# EAGLE board main (EAGLE 7.7.0)
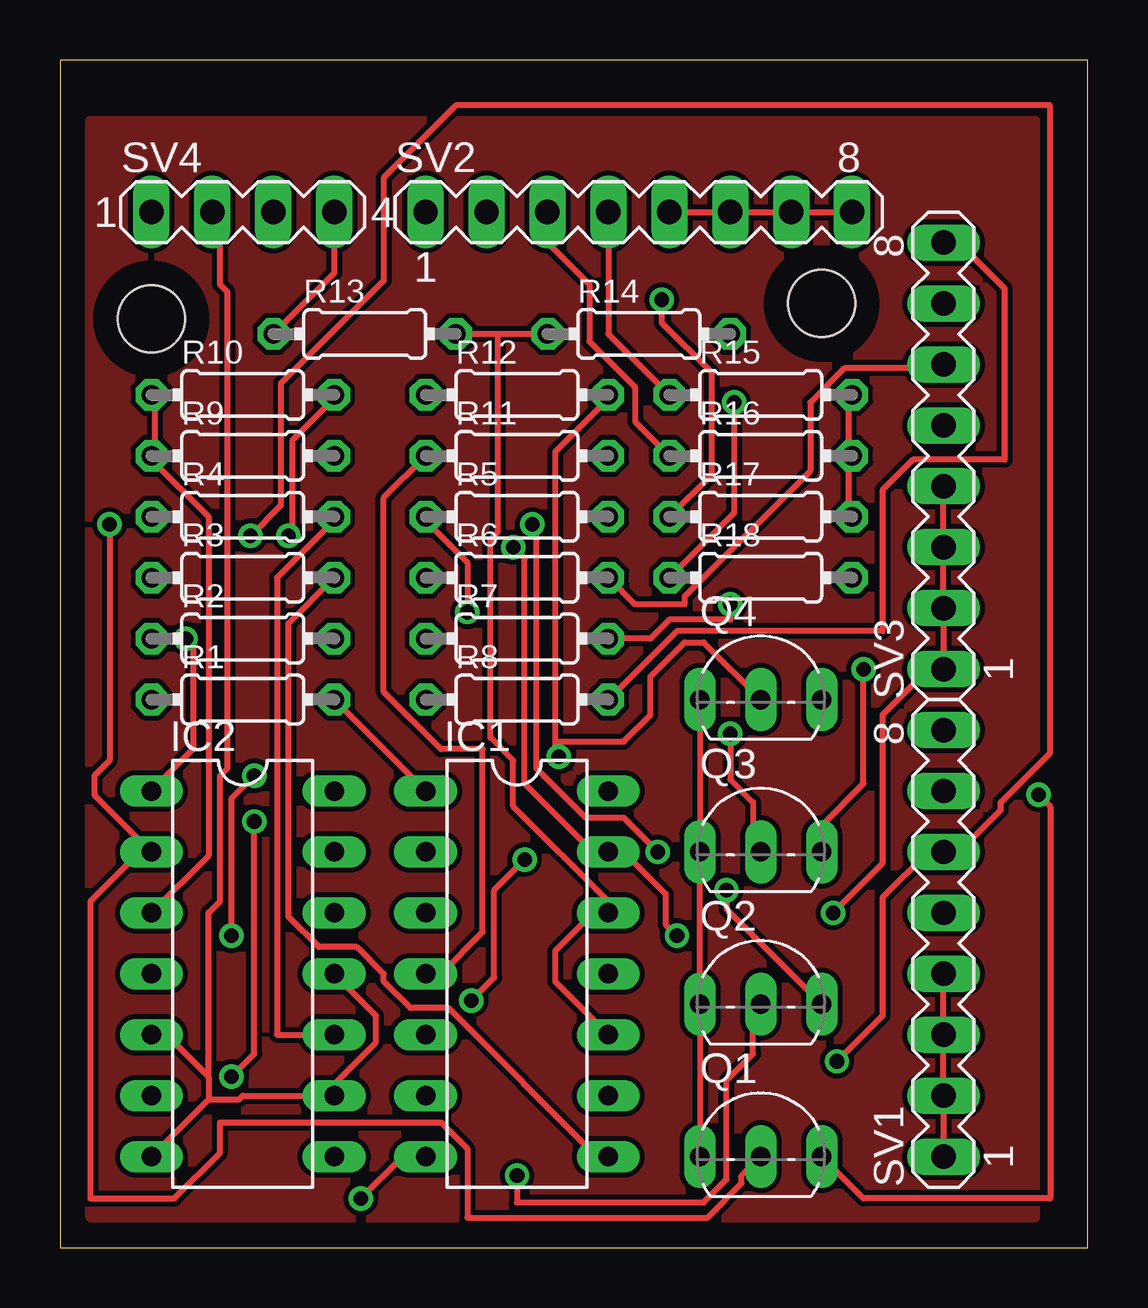
[diagram p0: board, top side]
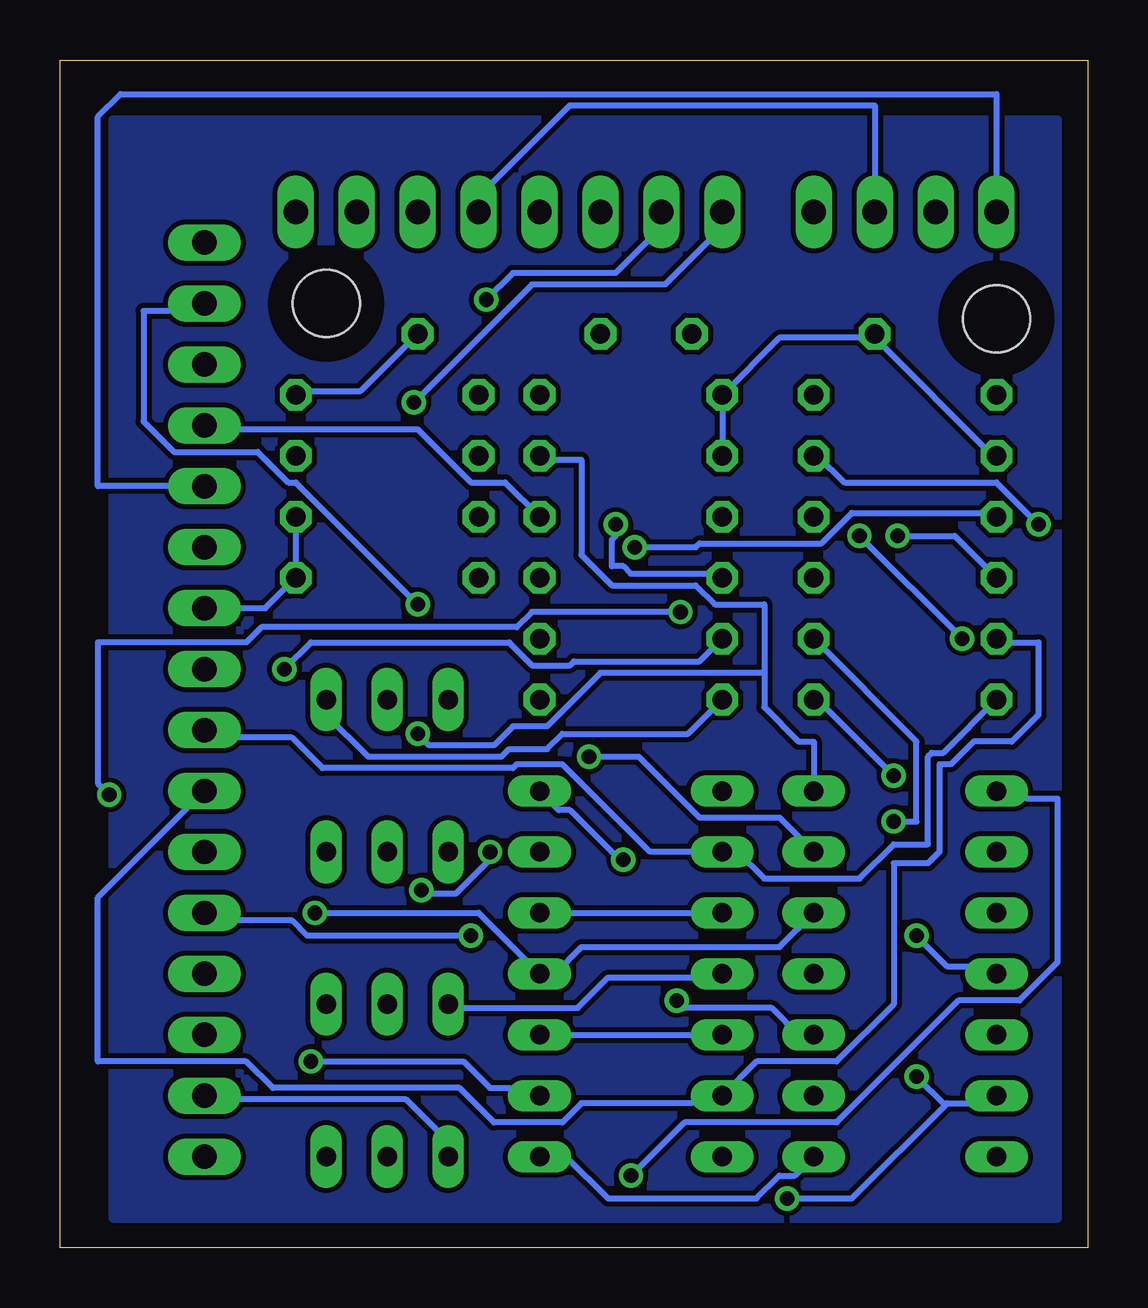
[diagram p1: board, bottom side, seen from below]

Size 42.85 x 49.52 mm. Coordinates in mm from the lower left corner, seen from the top.
Outline: 0,0 42.85,0 42.85,49.52 0,49.52 0,0
Copper layers (1*16): Top 0.035mm / dielectric 1.5mm / Bottom 0.035mm
Design rules "default": minimum track width 10mil, minimum drill 24mil, track to track 8mil, track to pad 8mil, pad to pad 8mil, via to via 8mil, smd to smd 8mil, copper to edge 40mil, drill to drill 8mil, minimum pad ring 10mil, minimum via ring 8mil, stop-mask expansion 4mil, vias tented up to drill 0mil, thermal gap 10mil
Holes 2.8 mm at 31.75,39.37 3.81,38.73

## Footprints (pad centres in the part's own frame; a part is rotated, then mirrored left to right if it is on the bottom)
DIL14 = drill 0.813 long: 1 -7.62,-3.81; 2 -5.08,-3.81; 3 -2.54,-3.81; 4 0,-3.81; 5 2.54,-3.81; 6 5.08,-3.81; 7 7.62,-3.81; 8 7.62,3.81; 9 5.08,3.81; 10 2.54,3.81; 11 0,3.81; 12 -2.54,3.81; 13 -5.08,3.81; 14 -7.62,3.81
TO92-EBC = drill 0.813 long: B 0,-1.27; C -2.54,-1.27; E 2.54,-1.27
0204/7 = drill 0.813 octagon: 1 -3.81,0; 2 3.81,0
MA08-1 = drill 1.016 long: 1 -8.89,0; 2 -6.35,0; 3 -3.81,0; 4 -1.27,0; 5 1.27,0; 6 3.81,0; 7 6.35,0; 8 8.89,0
MA04-1 = drill 1.016 long: 1 -3.81,0; 2 -1.27,0; 3 1.27,0; 4 3.81,0

## Placement (x,y rotation side)
IC1  LM324N  [DIL14]  19.05,11.43 270 top
IC2  LM339N  [DIL14]  7.62,11.43 270 top
Q1  BC487  [TO92-EBC]  29.21,5.08 0 top
Q2  BC487  [TO92-EBC]  29.21,11.43 0 top
Q3  BC487  [TO92-EBC]  29.21,17.78 0 top
Q4  BC487  [TO92-EBC]  29.21,24.13 0 top
R1  68kΩ  [0204/7]  7.62,22.86 0 top
R2  68kΩ  [0204/7]  7.62,25.4 0 top
R3  68kΩ  [0204/7]  7.62,27.94 0 top
R4  68kΩ  [0204/7]  7.62,30.48 0 top
R5  100Ω  [0204/7]  19.05,30.48 0 top
R6  100Ω  [0204/7]  19.05,27.94 0 top
R7  100Ω  [0204/7]  19.05,25.4 0 top
R8  100Ω  [0204/7]  19.05,22.86 0 top
R9  3k3Ω  [0204/7]  7.62,33.02 0 top
R10  3k3Ω  [0204/7]  7.62,35.56 0 top
R11  3k3Ω  [0204/7]  19.05,33.02 0 top
R12  3k3Ω  [0204/7]  19.05,35.56 0 top
R13  3k3Ω  [0204/7]  12.7,38.1 0 top
R14  3k3Ω  [0204/7]  24.13,38.1 0 top
R15  44Ω  [0204/7]  29.21,35.56 0 top
R16  44Ω  [0204/7]  29.21,33.02 0 top
R17  44Ω  [0204/7]  29.21,30.48 0 top
R18  44Ω  [0204/7]  29.21,27.94 0 top
SV1  Photodiode Connectors  [MA08-1]  36.83,12.7 90 top
SV2  IR LED Connectors  [MA08-1]  24.13,43.18 0 top
SV3  Visual LED Connector  [MA08-1]  36.83,33.02 90 top
SV4  Power In  [MA04-1]  7.62,43.18 0 top

## Library data of the parts
IC1 IC2 = linear
Q1-Q4 = transistor-npn
R1-R18 = resistor
SV1-SV4 = con-lstb; OC_FARNELL: unknown; OC_NEWARK: unknown

## Nets
5V: IC1.4 IC2.3 Q1.C Q2.C Q3.C Q4.C R9.1 R10.1 R11.1 R12.1 R13.1 SV1.1 SV1.2 SV1.3 SV1.4 SV4.4
+1.84V: SV2.5 SV2.6 SV2.7 SV2.8 SV4.3
AS1: IC1.1 IC2.4 R1.2
AS2: IC1.7 IC2.6 R2.2
AS3: IC1.8 IC2.8 R3.2
AS4: IC1.14 IC2.10 R4.2
GND: IC1.11 IC2.12 R14.2 R15.2 R16.2 R17.2 R18.2 SV3.1 SV3.2 SV3.3 SV3.4 SV4.1
N$1: Q1.E R5.1
N$4: Q2.E R6.1
N$5: Q3.E R7.1
N$6: Q4.E R8.1
N$12: R15.1 SV2.4
N$13: R16.1 SV2.3
N$14: R17.1 SV2.2
N$15: R18.1 SV2.1
PD1: IC1.2 R1.1 SV1.8
PD2: IC1.6 R2.1 SV1.7
PD3: IC1.9 R3.1 SV1.6
PD4: IC1.13 R4.1 SV1.5
T1: IC2.2 Q1.B R9.2
T2: IC2.1 Q2.B R10.2
T3: IC2.14 Q3.B R11.2
T4: IC2.13 Q4.B R12.2
VGND: IC1.3 IC1.5 IC1.10 IC1.12 R13.2 R14.1
VLED1: R5.2 SV3.5
VLED2: R6.2 SV3.6
VLED3: R7.2 SV3.7
VLED4: R8.2 SV3.8
VLOGIC: IC2.5 IC2.7 IC2.9 IC2.11 SV4.2

## Tracks (layer width: path | path; a pad name or v marks a point on that pad's centre or on a via)
5V
  Top 0.254: R13.1 11.43,40.64 SV4.4 | IC2.3 6.19,16.35 6.19,30.48 3.81,32.86 R9.1 3.97,32.86 3.97,35.4 R10.1 | SV1.1 SV1.2 SV1.3 SV1.4 | Q4.C Q3.C Q2.C Q1.C | R11.1 13.49,31.27 13.49,23.18 15.88,20.8 17.62,20.8 17.62,13.18 15.88,11.43 IC1.4
  Bottom 0.254: R11.1 R12.1 12.86,37.94 9.05,37.94 R13.1 8.89,37.94 3.97,33.02 R9.1 | IC1.4 15.4,11.27 20,11.27 21.27,10 26.51,10 Q2.C | SV1.2 36.67,6.19 28.42,6.19 26.67,4.45 Q1.C
+1.84V
  Top 0.254: SV2.5 SV2.6 SV2.7 SV2.8
  Bottom 0.254: SV4.3 8.89,47.62 21.59,47.62 25.4,43.81 SV2.5
AS1  (via drill 0.61)
  Top 0.254: v7.14,13.02 7.14,18.73 v8.1,19.68 | R1.2 IC1.1
  Bottom 0.254: IC2.4 4.13,11.75 5.87,11.75 v7.14,13.02 | v8.1,19.68 11.27,22.86 R1.2
AS2  (via drill 0.61)
  Top 0.254: v12.54,2.06 14.29,3.81 IC1.7 | v8.1,17.78 8.1,8.1 v7.14,7.14
  Bottom 0.254: IC2.6 4.13,6.03 5.87,6.03 5.95,5.95 | 5.95,5.95 9.84,2.06 v12.54,2.06 | R2.2 7.14,21.11 7.14,17.78 v8.1,17.78 | 5.95,5.95 v7.14,7.14
AS3
  Top 0.254: R3.2 9.53,26.04 9.53,13.81 10.79,12.54 12.38,12.54 13.49,11.43 13.49,11.11 14.61,10 16.19,10 22.38,3.81 IC1.8
  Bottom 0.254: IC2.8 12.22,3.02 12.86,3.02 13.81,2.06 20,2.06 21.75,3.81 IC1.8
AS4  (via drill 0.61)
  Top 0.254: IC2.10 9.05,8.89 9.05,27.94 11.43,30.32 R4.2 | v19.37,16.19 18.1,14.92 18.1,11.27 v17.14,10.32
  Bottom 0.254: IC1.14 22.07,18.26 21.59,18.26 19.53,16.19 v19.37,16.19 | v17.14,10.32 16.83,10 13.18,10 12.06,8.89 IC2.10
GND  (via drill 0.61)
  Top 0.254: R15.2 32.86,35.4 32.86,33.18 R16.2 32.86,33.02 32.86,30.64 R17.2 | 36.83,24.77 SV3.2 SV3.3 SV3.4 | v32.23,13.97 34.29,16.03 34.29,22.23 36.83,24.77 | 36.83,24.77 SV3.1
  Bottom 0.254: R17.2 R18.2 34.29,26.67 SV3.2 | R14.2 30.32,35.72 32.86,35.72 R15.2 | IC2.12 12.86,12.54 21.11,12.54 22.23,11.43 IC1.11 25.4,13.97 v32.23,13.97 | SV4.1 3.81,48.1 40.32,48.1 41.27,47.15 41.27,31.75 SV3.4
N$1  (via drill 0.61)
  Top 0.254: Q1.E 33.5,2.06 41.27,2.06 41.27,18.41 v40.8,18.89 | v16.99,26.51 16.99,28.57 15.24,30.32 R5.1
  Bottom 0.254: v40.8,18.89 41.27,19.37 41.27,25.24 35.08,25.24 34.45,25.88 23.81,25.88 23.18,26.51 v16.99,26.51
N$4  (via drill 0.61)
  Top 0.254: Q2.E 27.78,14.13 v27.78,14.92 | v24.92,16.51 23.5,17.94 21.91,17.94 19.84,20 19.84,30 v19.68,30.16
  Bottom 0.254: v27.78,14.92 27.62,14.76 26.35,14.76 24.92,16.19 v24.92,16.51 | v19.68,30.16 19.68,29.69 19.84,29.53 19.84,28.42 19.37,28.42 19.05,28.1 15.4,28.1 R6.1
N$5  (via drill 0.61)
  Top 0.254: v33.5,24.13 33.5,19.37 31.75,17.62 Q3.E
  Bottom 0.254: R7.1 16.19,24.45 21.43,24.45 21.59,24.29 23.18,24.29 24.13,25.24 32.38,25.24 v33.5,24.13
N$6
  Bottom 0.254: R8.1 16.67,21.43 21.91,21.43 22.54,20.8 24.13,20.8 24.45,20.48 30,20.48 31.75,22.23 Q4.E
N$12
  Top 0.254: R15.1 22.86,38.1 SV2.4
N$13
  Top 0.254: R16.1 23.97,34.45 23.97,35.88 22.07,37.78 22.07,40.16 20.32,41.91 SV2.3
N$14  (via drill 0.61)
  Top 0.254: R17.1 27.15,32.23 27.15,36.51 25.08,38.58 v25.08,39.53
  Bottom 0.254: v25.08,39.53 23.97,40.64 19.68,40.64 17.78,42.55 SV2.2
N$15  (via drill 0.61)
  Top 0.254: R18.1 28.1,30.64 v28.1,35.24
  Bottom 0.254: v28.1,35.24 23.18,40.16 17.62,40.16 15.24,42.55 SV2.1
N$16
  pour Bottom: 1.27,46.99 40.64,46.99 40.64,1.27 1.27,1.27
N$17
  pour Top: 1.27,46.99 40.64,46.99 40.64,1.27 1.27,1.27
PD1
  Bottom 0.254: R1.1 6.03,20.64 6.51,20.64 6.67,20.48 6.67,16.83 8.1,16.83 9.53,15.4 13.49,15.4 14.61,16.51 IC1.2 18.26,16.51 21.91,20.16 23.81,20.16 23.97,20 31.91,20 33.18,21.27 36.51,21.27 SV1.8
PD2
  Bottom 0.254: R2.1 3.65,25.24 2.06,25.24 2.06,22.23 3.17,21.11 4.76,21.11 5.71,20.16 6.19,20.16 6.19,16.51 6.67,16.03 8.1,16.03 8.1,10.16 10.48,7.78 13.81,7.78 IC1.6 16.19,6.35 16.51,6.03 21.11,6.03 21.91,5.24 24.77,5.24 26.19,6.67 33.97,6.67 35.08,7.78 41.27,7.78 41.27,14.61 SV1.7
PD3  (via drill 0.61)
  Top 0.254: v32.38,7.78 34.29,9.68 34.29,14.61 36.2,16.51 SV1.6 37.47,16.51 39.21,18.26 39.21,18.57 41.27,20.64 41.27,47.62 16.51,47.62 13.49,44.61 13.49,40.32 9.21,36.04 9.21,30.96 v7.94,29.69
  Bottom 0.254: IC1.9 23.18,6.67 24.92,6.67 26.04,7.78 v32.38,7.78 | R3.1 5.56,29.69 v7.94,29.69
PD4  (via drill 0.61)
  Top 0.254: v18.89,29.21 19.37,28.73 19.37,19.37 22.23,16.51 IC1.13 23.5,16.51 25.24,14.76 25.24,13.49 v25.72,13.02
  Bottom 0.254: R4.1 3.97,30.64 9.84,30.64 11.11,29.37 16.19,29.37 16.35,29.21 v18.89,29.21 | SV1.5 36.51,13.65 33.18,13.65 32.54,13.02 v25.72,13.02
T1  (via drill 0.61)
  Top 0.254: v2.06,30.16 2.06,20.32 1.43,19.68 1.43,18.89 IC2.2 3.49,16.67 1.27,14.45 1.27,2.06 4.76,2.06 6.67,3.97 6.67,5.24 15.88,5.24 16.99,4.13 16.99,1.27 26.99,1.27 28.42,2.7 28.42,3.02 Q1.B
  Bottom 0.254: v2.06,30.16 3.81,31.91 10.16,31.91 11.27,33.02 R9.2
T2  (via drill 0.61)
  Top 0.254: IC2.1 5.56,20.8 5.56,25.08 v5.24,25.4 | v9.53,29.69 9.68,29.84 9.68,33.66 11.43,35.4 R10.2 | Q2.B 28.89,9.84 28.89,8.1 27.78,6.99 27.78,2.86 26.83,1.91 19.05,1.91 v19.05,3.02
  Bottom 0.254: v9.53,29.69 v5.24,25.4 | v19.05,3.02 16.83,5.24 10.48,5.24 5.4,10.32 2.86,10.32 1.27,11.91 1.27,18.73 2.54,18.73 2.86,19.05 IC2.1
T3  (via drill 0.61)
  Top 0.254: Q3.B 28.89,16.83 28.89,18.57 27.94,19.53 v27.94,21.43
  Bottom 0.254: IC2.14 11.43,21.11 12.06,21.11 13.49,22.54 13.49,23.97 | 13.49,23.97 13.49,26.83 15.56,26.83 16.35,27.62 19.84,27.62 21.11,28.89 21.11,32.86 22.7,32.86 R11.2 | v27.94,21.43 27.46,20.95 24.77,20.95 23.97,21.75 22.54,21.75 20.32,23.97 13.49,23.97
T4  (via drill 0.61)
  Top 0.254: v20.8,20.48 20.64,20.64 20.64,21.11 | 20.64,21.11 20.64,33.18 22.86,35.4 R12.2 | Q4.B 26.83,25.24 26.04,25.24 24.61,23.81 24.61,22.23 23.5,21.11 20.64,21.11
  Bottom 0.254: IC2.13 12.86,17.94 16.19,17.94 18.73,20.48 v20.8,20.48
VGND
  Top 0.254: R14.1 18.26,38.1 | 18.26,38.1 R13.2 | 18.26,38.1 18.26,29.84 17.94,29.53 17.94,21.27 18.89,20.32 18.89,18.41 22.86,14.45 IC1.12 22.7,14.45 20.64,12.38 20.64,11.11 IC1.10
  Bottom 0.254: IC1.10 IC1.5 | IC1.12 IC1.3
VLED1
  Bottom 0.254: R5.2 24.29,31.91 25.72,31.91 27.94,34.13 36.67,34.13 SV3.5
VLED2
  Top 0.254: R6.2 23.97,26.83 26.04,26.83 26.04,27.15 31.27,32.38 31.27,35.24 32.7,36.67 36.83,36.67 SV3.6
VLED3  (via drill 0.61)
  Top 0.254: R7.2 24.61,25.4 25.4,26.19 27.94,26.19 v27.94,26.83
  Bottom 0.254: v27.94,26.83 33.02,31.91 33.34,31.91 34.61,33.18 38.1,33.18 39.37,34.45 39.37,39.05 37.15,39.05 SV3.7
VLED4
  Top 0.254: R8.2 25.72,25.72 34.29,25.72 34.29,31.59 35.56,32.86 39.37,32.86 39.37,40.01 37.47,41.91 SV3.8
VLOGIC
  Top 0.254: 6.19,6.19 IC2.7 | 6.19,6.19 6.19,7.14 6.11,7.22 | 6.11,7.22 4.45,8.89 IC2.5 | 6.19,6.19 7.46,6.19 7.62,6.35 IC2.9 11.43,6.83 13.18,8.57 13.18,9.68 IC2.11 | SV4.2 6.67,42.86 6.67,40.16 6.99,39.85 6.99,20 6.67,19.68 6.67,14.45 6.19,13.97 6.19,7.3 6.11,7.22

## Text on the board
tValues: GND | VLG | IRV | 5V | GND | GND | GND | GND | IR+ | IR+ | IR+ | IR+ | L4+ | L3+ | L2+ | L1+ | GND | GND | GND | GND | PD1 | C B E | PD2 | PD3 | C B E | PD4 | 5V | 5V | C B E | 5V | 5V